# Altium PCB Smart_Clock_PCB.PcbDoc (part 1 of 2)
Units mil, origin at the board's own origin, x right, y up, seen from the top; angles counter-clockwise.
Board outline 3930 x 2549 mil, 2 copper layers (Top Layer, Bottom Layer); 123 components, 100 nets, 411 pads, 288 vias.
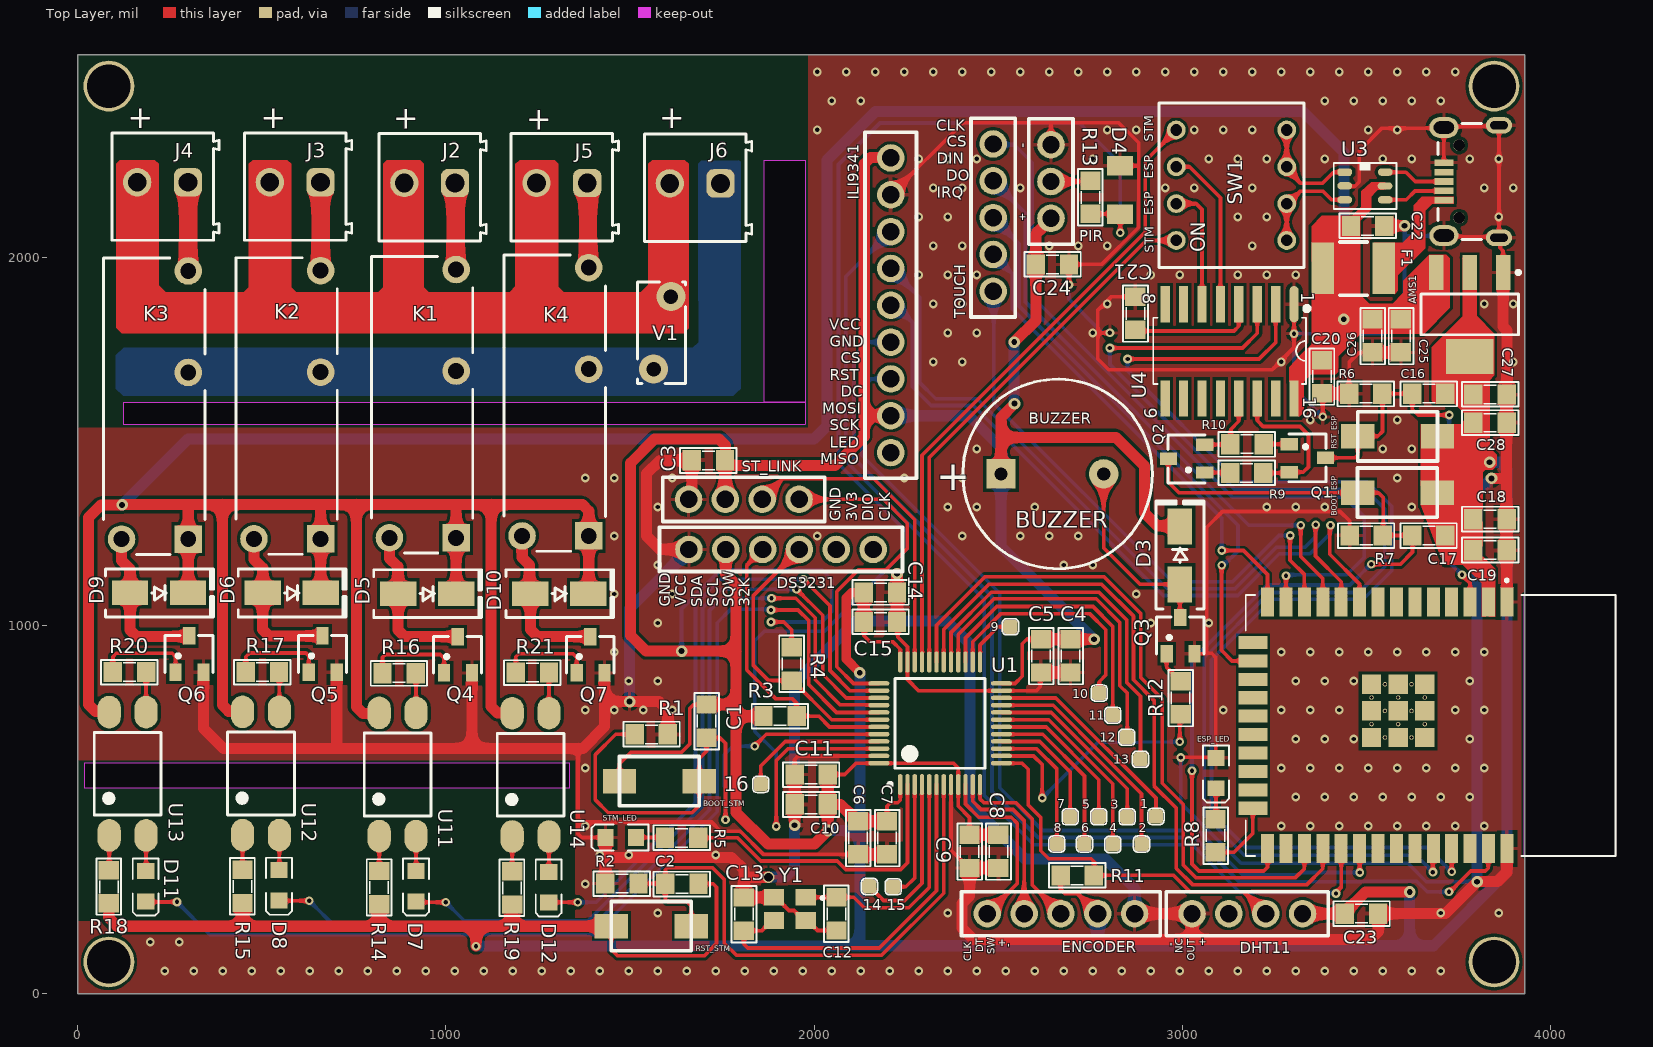
[diagram p0: Top Layer view]
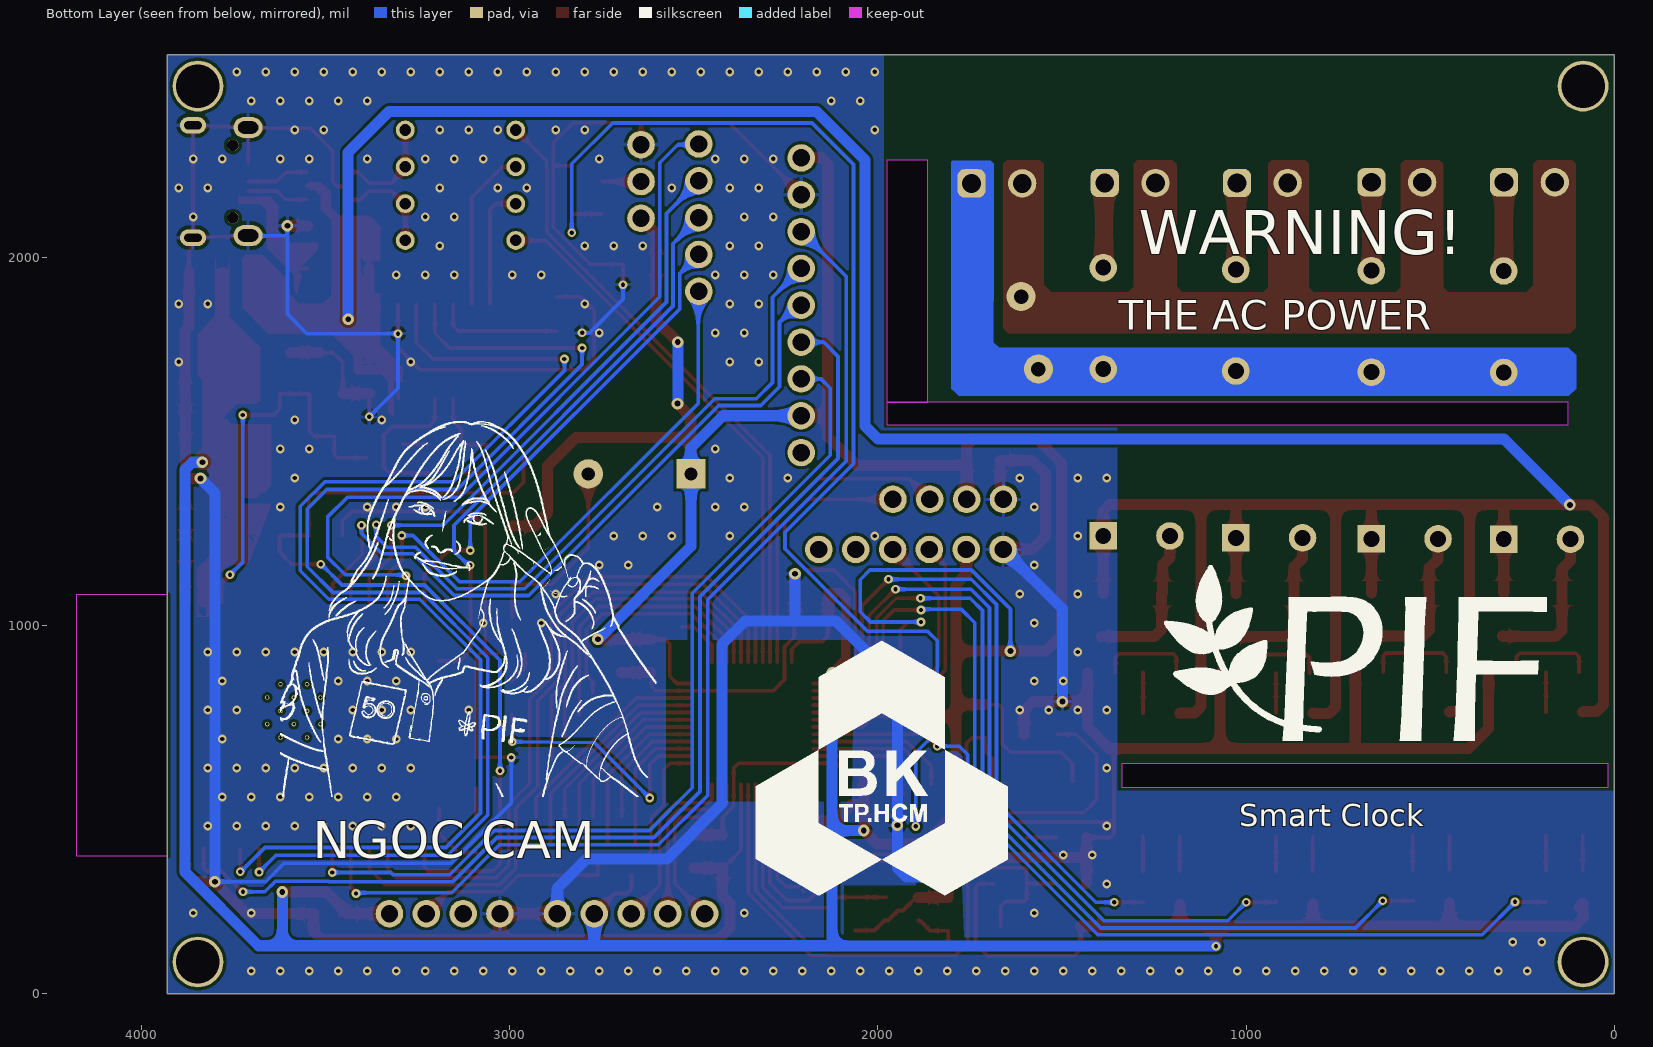
[diagram p1: Bottom Layer view, seen from below]
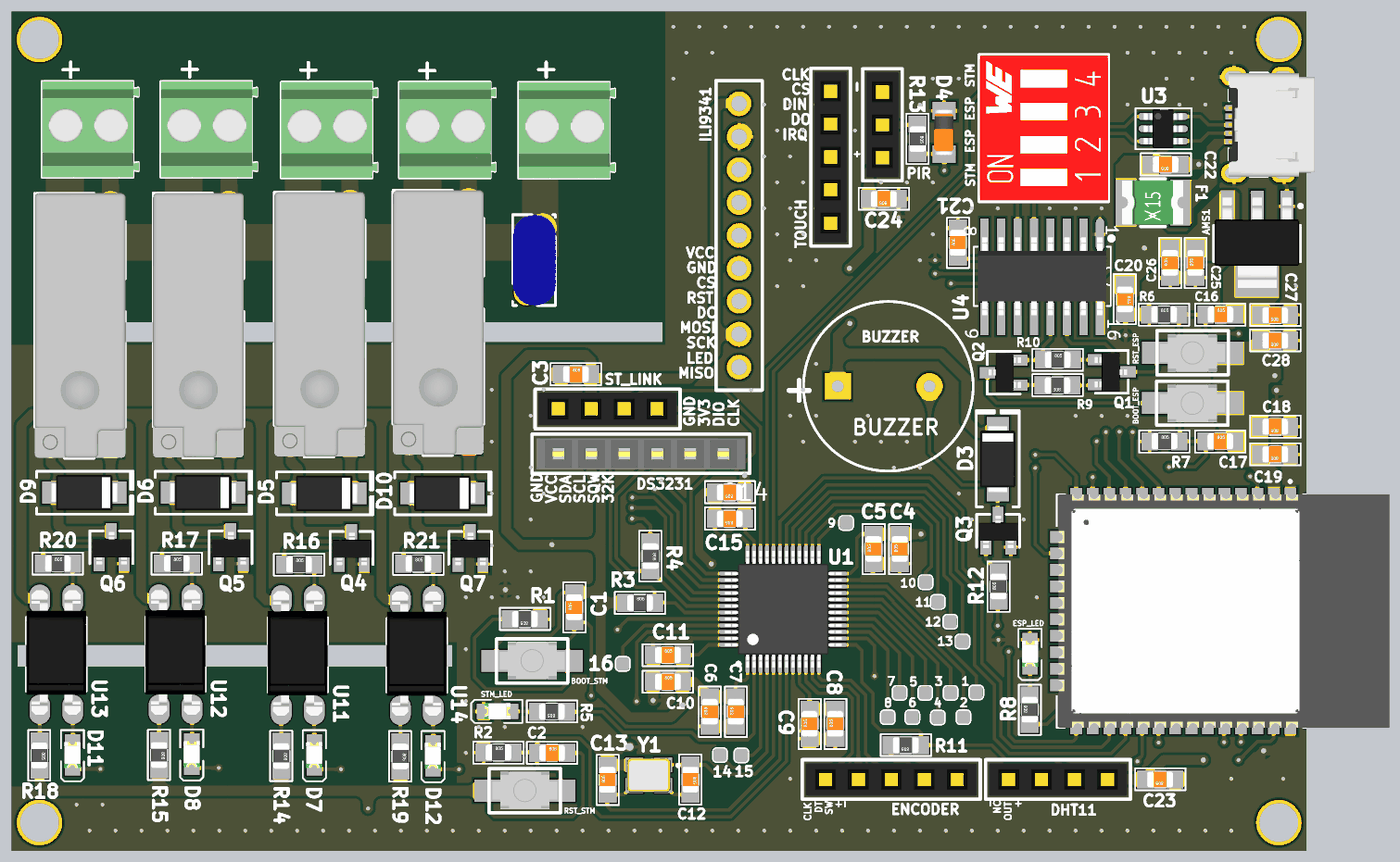
[diagram p3: 3D render of the assembled board from above, using the file's embedded part models]

## Layer stack, top to bottom
Top Solder: solder mask 0.4, Solder Resist, Dk 3.5
Top Layer: signal copper 1.4
Dielectric 1: dielectric 12.6, FR-4, Dk 4.8
Bottom Layer: signal copper 1.4
Bottom Solder: solder mask 0.4, Solder Resist, Dk 3.5

## Board outline
0,0 0,2549 3930,2549 3930,0
cut-out: 18,625 18,559 1337,559 1337,625
cut-out: 126,1545 126,1606 1976,1606 1976,1546 1975,1545
cut-out: 1864,2263 1976,2263 1976,1606 1864,1606

## Design rules (kind name [scope] priority, off if disabled: settings)
Clearance [All] p1: gap=8 ignorepadtopadclearanceinfootprint=FALSE except(0: Arc-Text Track-Text SMDPad-Text THPad-Text Via-Text Fill-Text Poly-Text Region-Text Text-Text)
PolygonConnect [All] p1: connectstyle=Relief reliefconductorwidth=10 reliefentries=4 polygonreliefangle="90 Angle" airgapwidth=10
RoutingVias [All] p1: holewidth=11.81 width=23.62 viastyle="Through Hole" minholewidth=11.81 minwidth=23.62 maxholewidth=11.81 maxwidth=23.62
SolderMaskExpansion [All] p1: expansion=4 istentingtop=FALSE
Width [All] p1: maxlimit=50 minlimit=10 preferedwidth=30
30 further rules are at their usual default settings.

## Classes and differential pairs
component class USB: C20 C21 C22 F1 Q1 Q2 R9 R10 SW1 U3 U4
component class RELAY: D5 D6 D7 D8 D9 D10 D11 D12 J2 J3 J4 J5 J6 K1 K2 K3 K4 Q4 Q5 Q6 Q7 R14 R15 R16 R17 R18 R19 R20 R21 U11 U12 U13 U14 V1
component class POWER_SUPPLY: AMS1 C25 C26 C27 C28
component class PERIPHERAL: C23 C24 D3 D4 DHT11 DS3231 ENCODER ILI9341 PIR Q3 R11 R12 R13 TOUCH
component class ESP32: BOOT_ESP C16 C17 C18 C19 ESP_LED R6 R7 R8 RST_ESP
component class STM32: 1 2 3 4 5 6 7 8 9 10 11 12 13 14 15 16 BOOT_STM C1 C2 C3 C4 C5 C6 C7 C8 C9 C10 C11 C12 C13 C14 C15 R1 R2 R3 R4 R5 RST_STM ST_LINK STM_LED U1 Y1

## Components (designator, comment, footprint, x,y, rotation, side; value= is the part's Value field where it differs from the comment)
1 "Test Point" TP 2928,481 r90 top
2 "Test Point" TP 2889,406 r90 top
3 "Test Point" TP 2850,480 r90 top
4 "Test Point" TP 2811,405 r90 top
5 "Test Point" TP 2773,480 r90 top
6 "Test Point" TP 2734,406 r90 top
7 "Test Point" TP 2695,480 r90 top
8 "Test Point" TP 2659,406 r90 top
9 "Test Point" TP 2533,996 r90 top
10 "Test Point" TP 2774,816 r90 top
11 "Test Point" TP 2811,756 r90 top
12 "Test Point" TP 2849,696 r90 top
13 "Test Point" TP 2886,636 r90 top
14 "Test Point" TP 2150,291 r90 top
15 "Test Point" TP 2215,290 r90 top
16 "Test Point" TP 1855,568 r90 top
*1 "ESP32 WROOM 32" ESP32-WROOM-32D 3673.91,728.35 r270 top
AMS1 "AMS1117-3.3V" SOT223 3780,1844 r180 top value="AMS1117-3.3V SOT223"
BOOT_ESP "Button SMD 2 Pin 3x4mm" "BUTTON SMD 2 PIN" 3475.46,1360 r0 top (schematic designator B4)
BOOT_STM "Button SMD 2 Pin 3x4mm" "BUTTON SMD 2 PIN" 1688,577 r180 top (schematic designator B1)
BUZZER "Buzzer" BUZZER 2586,1411 r0 top (schematic designator B*1)
C1 "Cap Non-Pol SMD" CAP-SM-0805 1708,695 r90 top value=1uF/25V
C2 "Cap Non-Pol SMD" CAP-SM-0805 1596,298 r0 top value=1uF/25V
C3 "Cap Non-Pol SMD" CAP-SM-0805 1668,1448 r0 top value=100nF/25V
C4 "Cap Non-Pol SMD" CAP-SM-0805 2696,872 r90 top value=1uF/25V
C5 "Cap Non-Pol SMD" CAP-SM-0805 2616,872 r90 top value=10nF/25V
C6 "Cap Non-Pol SMD" CAP-SM-0805 2119,378 r90 top value=1uF/25V
C7 "Cap Non-Pol SMD" CAP-SM-0805 2198,378 r90 top value=10nF/25V
C8 "Cap Non-Pol SMD" CAP-SM-0805 2500,341 r90 top value=1uF/25V
C9 "Cap Non-Pol SMD" CAP-SM-0805 2422,341 r90 top value=10nF/25V
C10 "Cap Non-Pol SMD" CAP-SM-0805 1947,514 r0 top value=1uF/25V
C11 "Cap Non-Pol SMD" CAP-SM-0805 1947,595 r0 top value=10nF/25V
C12 "Cap Non-Pol SMD" CAP-SM-0805 2060.5,261.5 r270 top value=10pF/25V
C13 "Cap Non-Pol SMD" CAP-SM-0805 1809,171 r90 top value=10pF/25V
C14 "Cap Non-Pol SMD" CAP-SM-0805 2225,1089 r180 top value=1uF/25V
C15 "Cap Non-Pol SMD" CAP-SM-0805 2225,1009 r180 top value=10nF/25V
C16 "Cap Non-Pol SMD" CAP-SM-0805 3624,1629 r0 top value=1uF/25V
C17 "Cap Non-Pol SMD" CAP-SM-0805 3623.78,1243.96 r0 top value=1uF/25V
C18 "Cap Non-Pol SMD" CAP-SM-0805 3880,1288 r180 top value=10uF/25V
C19 "Cap Non-Pol SMD" CAP-SM-0805 3880,1204 r180 top value=100nF/25V
C20 "Cap Non-Pol SMD" CAP-SM-0805 3379,1720 r270 top value=100nF/25V
C21 "Cap Non-Pol SMD" CAP-SM-0805 2872,1802 r90 top value=100nF/25V
C22 "Cap Non-Pol SMD" CAP-SM-0805 3547.5,2084.5 r180 top value=100nF/25V
C23 "Cap Non-Pol SMD" CAP-SM-0805 3531,217 r180 top value=100nF/25V
C24 "Cap Non-Pol SMD" CAP-SM-0805 2692,1980 r180 top value=10uF/25V
C25 "Cap Non-Pol SMD" CAP-SM-0805 3593,1741 r90 top value=1uF/25V
C26 "Cap Non-Pol SMD" CAP-SM-0805 3516,1741 r90 top value=100nF/25V
C27 "Cap Non-Pol SMD" CAP-SM-0805 3880,1550 r180 top value=100nF/25V
C28 "Cap Non-Pol SMD" CAP-SM-0805 3880,1627 r180 top value=1uF/25V
D3 "SS34" "DIODE SMA" 2993,1189.74 r90 top
D4 "3.3V" "DIODE ZENNER SMD SOD80" 2830,2181.94 r270 top
D5 "SS34" "DIODE SMA" 949.26,1086 r0 top
D6 "SS34" "DIODE SMA" 581.26,1088 r0 top
D7 "LED SMD" LED_0805_Blue 919,291.66 r270 top
D8 "LED SMD" LED_0805_Blue 547,294 r270 top
D9 "SS34" "DIODE SMA" 221.26,1088 r0 top
D10 "SS34" "DIODE SMA" 1308,1086 r0 top
D11 "LED SMD" LED_0805_Blue 185,291.66 r270 top
D12 "LED SMD" LED_0805_Blue 1279,289 r270 top
DHT11 "DHT11_4PIN" "Header 4 Pin" 3326,217 r180 top (schematic designator U8)
DS3231 "DS3231 RTC" "header 6 pin" 2060,1006 r180 top (schematic designator U7)
ENCODER "Rotary Encoder" "Header 5 Pin" 2470,217 r0 top (schematic designator U10)
ESP_LED "LED SMD" LED_0805_Blue 3091,599 r270 top (schematic designator D2)
F1 "6V, 1.5A" Fuse_SMD_1812 3463,1969 r180 top value="24V, 1.5A"
H1 "Hole" "LO KHOAN 3MM" 3846,86 r0 top
H2 "Hole" "LO KHOAN 3MM" 3846,2464 r0 top
H3 "Hole" "LO KHOAN 3MM" 85,86 r0 top
H4 "Hole" "LO KHOAN 3MM" 85,2464 r0 top
ILI9341 "ILI9341_DISPLAY" "HEADER 9 PIN" 2008,1569 r90 top (schematic designator U6)
J1 "Micro USB 2.0 Type B" 629105150521 3824,2205.03 r90 top
J2 "10A, 300V" 691214110002 956.1,2189.19 r180 top
J3 "10A, 300V" 691214110002 590.9,2191.19 r180 top
J4 "10A, 300V" 691214110002 230.9,2191.19 r180 top
J5 "10A, 300V" 691214110002 1315,2189.19 r180 top
J6 "10A, 300V" 691214110002 1676.9,2188.19 r180 top
K1 "277 VAC, 30 VDC" HF46F 937.45,1601.83 r270 top
K2 "277 VAC, 30 VDC" HF46F 569.45,1598.83 r270 top
K3 "277 VAC, 30 VDC" HF46F 210,1598 r270 top
K4 "277 VAC, 30 VDC" HF46F 1297.45,1606.83 r270 top
PIR "PIR" "Header 3 Pin" 2643,2105 r90 top (schematic designator U9)
Q1 "BC817" SOT-23 3339.21,1454.8 r270 top value=C9014
Q2 "BC817" SOT-23 3011.21,1451.8 r90 top value=C9014
Q3 "HF" SOT-23 2994,972 r0 top value=C9014
Q4 "HF" SOT-23 1032,920 r0 top value=C9014
Q5 "HF" SOT-23 665,922 r0 top value=C9014
Q6 "HF" SOT-23 303,922 r0 top value=C9014
Q7 "HF" SOT-23 1392,920 r0 top value=C9014
R1 "RESISTOR SMD" RES-SM-0805 1603,704 r180 top value=10K/1%
R2 "RESISTOR SMD" RES-SM-0805 1433,299 r0 top value=10K/1%
R3 "RESISTOR SMD" RES-SM-0805 1862.5,753.5 r0 top value=10K/1%
R4 "RESISTOR SMD" RES-SM-0805 1939,940 r270 top value=10K/1%
R5 "RESISTOR SMD" RES-SM-0805 1685,423 r180 top value=300/1%
R6 "RESISTOR SMD" RES-SM-0805 3453,1629 r0 top value=10K/1%
R7 "RESISTOR SMD" RES-SM-0805 3454,1244 r0 top value=10K/1%
R8 "RESISTOR SMD" RES-SM-0805 3090,384 r90 top value=300/1%
R9 "RESISTOR SMD" RES-SM-0805 3130.21,1491.8 r0 top value=10K/1%
R10 "RESISTOR SMD" RES-SM-0805 3219.21,1413.8 r180 top value=10K/1%
R11 "RESISTOR SMD" RES-SM-0805 2759,321 r180 top value=5.1K/1%
R12 "RESISTOR SMD" RES-SM-0805 2995,758 r90 top value=10K/1%
R13 "RESISTOR SMD" RES-SM-0805 2750,2207 r270 top value=1K/1%
R14 "RESISTOR SMD" RES-SM-0805 819,333 r270 top value=100/1%
R15 "RESISTOR SMD" RES-SM-0805 448,336 r270 top value=100/1%
R16 "RESISTOR SMD" RES-SM-0805 828,870 r0 top value=10K/1%
R17 "RESISTOR SMD" RES-SM-0805 457,873 r0 top value=10K/1%
R18 "RESISTOR SMD" RES-SM-0805 85,335 r270 top value=100/1%
R19 "RESISTOR SMD" RES-SM-0805 1180,332 r270 top value=100/1%
R20 "RESISTOR SMD" RES-SM-0805 96,873 r0 top value=10K/1%
R21 "RESISTOR SMD" RES-SM-0805 1190,872 r0 top value=10K/1%
RST_ESP "Button SMD 2 Pin 3x4mm" "BUTTON SMD 2 PIN" 3476,1513 r0 top (schematic designator B3)
RST_STM "Button SMD 2 Pin 3x4mm" "BUTTON SMD 2 PIN" 1666,183 r180 top (schematic designator B2)
ST_LINK "ST_Link" "Header 4 Pin" 1959,1342 r180 top (schematic designator U2)
STM_LED "LED SMD" LED_0805_Blue 1475,424 r180 top (schematic designator D1)
SW1 "418117270904" 418117270904 3133,2195 r90 top
TOUCH "ILI9341_TOUCH" "Header 5 Pin" 2486,1907 r90 top (schematic designator U5)
U1 "STM32F103xx_LQFP48" STM32_LQPF48 2342,734 r90 top
U3 "USBLC6-2SC6 TVS" SOT23-6 3500,2198 r0 top
U4 "CH340C" SOIC16_50_284_25X90_SMT 3129,1744 r270 top
U11 "OPTO PC817 SMD" SOP4 869,595 r90 top value=PC817
U12 "OPTO PC817 SMD" SOP4 498,597.68 r90 top value=PC817
U13 "OPTO PC817 SMD" SOP4 136,597 r90 top value=PC817
U14 "OPTO PC817 SMD" SOP4 1230,594 r90 top value=PC817
V1 "AC 300V" Varistor 1585,1792 r90 top
Y1 "16MHz" WE-XTAL_CFPX-180 1934,230 r180 top

## Footprints (in the part's own frame and the unit in brackets; to place one, negate y for a bottom-side part, rotate by r counter-clockwise, add the part's x,y. Pads: shape width x height; smd on the part's side, far side on the other; paste and mask are expansions set on the pad)
418117270904 [mm] "2.54 mm compact THT with raised actuator, 4p"
  round 1.3 hole 0.8: 1(-3.81,-3.81) 2(-1.27,-3.81) 3(1.27,-3.81) 4(3.81,-3.81) 5(3.81,3.81) 6(1.27,3.81) 7(-1.27,3.81) 8(-3.81,3.81)
  silkscreen extent -5.68,-5 5.68,5, body extent -5.58,-4.95 5.58,4.95, height 6.9
629105150521 [mm] "Micro USB 2.0 SMT Type B Horizontal 5 Contacts High Current"
  rect 0.45x1.3 smd: 1(-1.3,2.9) 2(-0.65,2.9) 3(0,2.9) 4(0.65,2.9) 5(1.3,2.9)
  round 0.8 hole 0.8 unplated: MH1(-2.5,1.85) MH2(2.5,1.85)
  oval 1.15x1.8 hole 0.55 slot 1.2 at 90 deg: Shell(-3.875,-0.9) Shell(3.875,-0.9)
  oval 1.45x2 hole 0.85 slot 1.4 at 90 deg: Shell(-3.725,2.9) Shell(3.725,2.9)
  silkscreen extent -4,0.3 4,3.3, body extent -4,-3.3 4,3.3, height 2.75
691214110002 [mm] "3.50 mm Horizontal Entry Modular, 2p"
  rrect50% 1.95x1.95 hole 1.3: 1(-1.75,-0.3)
  round 1.95 hole 1.3: 2(1.75,-0.3)
  silkscreen extent -3.9,-3.7 3.5,3.7, body extent -3.95,-3.7 3.5,3.7, height 8.55
"BUTTON SMD 2 PIN" [mm] "Button SMD 2 Pin 3x4mm"
  rect 2.3x1.7 smd: 1(0,0) 2(5.5,0)
  silkscreen extent 0,-1.7 5.5,1.7, body extent 0.24,-1.48 5.24,1.42, height 2
BUZZER [mil]
  rect 80x80 hole 36: 1(-78.73,0)
  round 80 hole 36: 2(200,0)
  silkscreen extent -182,-257 332,257
CAP-SM-0805 [mil]
  rect 50x55 smd: 1(0,0) 2(90,0)
  silkscreen extent -32,-34 121,33, body extent 6,-25 84,25, height 31
"DIODE SMA" [mm] "SMA"
  rect 2.5x1.7 smd: 1(-2,0) 2(2,0)
  silkscreen extent -3.68,-1.65 3.75,1.65, body extent -2.6,-1.37 2.6,1.37, height 2.4
"DIODE ZENNER SMD SOD80" [mm] "SOD80"
  rect 1.35x1.8 smd: 1(1.675,0) 2(-1.675,0)
  body extent -1.75,-0.76 1.75,0.74, height 1.45
ESP32-WROOM-32D [mm]
  rect 2x0.9 smd: 1(-8.5,5.26) 2(-8.5,3.99) 3(-8.5,2.72) 4(-8.5,1.45) 5(-8.5,0.18) 6(-8.5,-1.09) 7(-8.5,-2.36) 8(-8.5,-3.63) 9(-8.5,-4.9) 10(-8.5,-6.17) 11(-8.5,-7.44) 12(-8.5,-8.71) 13(-8.5,-9.98) 14(-8.5,-11.25) 25(8.5,-11.25) 26(8.5,-9.98) 27(8.5,-8.71) 28(8.5,-7.44) 29(8.5,-6.17) 30(8.5,-4.9) 31(8.5,-3.63) 32(8.5,-2.36) 33(8.5,-1.09) 34(8.5,0.18) 35(8.5,1.45) 36(8.5,2.72) 37(8.5,3.99) 38(8.5,5.26)
  rect 0.9x2 smd: 15(-5.715,-12.25) 16(-4.445,-12.25) 17(-3.175,-12.25) 18(-1.905,-12.25) 19(-0.635,-12.25) 20(0.635,-12.25) 21(1.905,-12.25) 22(3.175,-12.25) 23(4.445,-12.25) 24(5.715,-12.25)
  rect 1.33x1.33 smd: 39(-2.835,-0.405) 39(-2.835,-2.24) 39(-2.835,-4.075) 39(-1,-0.405) 39(-1,-2.24) 39(-1,-4.075) 39(0.835,-0.405) 39(0.835,-2.24) 39(0.835,-4.075)
  round 0.3 hole 0.2: 39(-2.835,-1.322) 39(-2.835,-3.157) 39(-1.917,-0.405) 39(-1.917,-2.24) 39(-1.917,-4.075) 39(-1,-1.322) 39(-1,-3.157) 39(-0.082,-0.405) 39(-0.082,-2.24) 39(-0.082,-4.075) 39(0.835,-1.322) 39(0.835,-3.157)
  Keep-Out Layer region: 9,6.45 -9,6.45 -9,12.75 9,12.75
  Keep-Out Layer region: 9,6.45 -9,6.45 -9,12.75 9,12.75
  silkscreen extent -10.1,-12.75 9,12.75, body extent -9,-12.62 9,12.88, height 3.2
Fuse_SMD_1812 [mil] "Fuse SMD, size 1812"
  rect 60x140 smd: 0(-83.41,0) 1(82,0)
  silkscreen extent -38,-72 36,73, body extent -93,-67 93,67, height 18
"Header 3 Pin" [mm] "2.54mm"
  round 1.9 hole 1.2: 1(0,0) 2(2.54,0) 3(5.08,0)
  silkscreen extent -1.78,-1.52 6.86,1.52, body extent -1.52,-1.25 6.6,1.25, height 4.75
"Header 4 Pin" [mm] "2.54mm"
  round 1.9 hole 1.2: 1(0,0) 2(2.54,0) 3(5.08,0) 4(7.62,0)
  silkscreen extent -1.78,-1.52 9.4,1.52, body extent -1.52,-1.25 9.14,1.25, height 5
"Header 5 Pin" [mm] "2.54mm"
  round 1.9 hole 1.2: 1(0,0) 2(2.54,0) 3(5.08,0) 4(7.62,0) 5(10.16,0)
  silkscreen extent -1.78,-1.52 11.94,1.52, body extent -1.52,-1.25 11.68,1.25, height 4.75
"header 6 pin" [mm] "2.54mm"
  round 1.9 hole 1.2: 1(-2.54,-5.08) 2(0,-5.08) 3(2.54,-5.08) 4(5.08,-5.08) 5(7.62,-5.08) 6(10.16,-5.08)
  silkscreen extent -4.57,-6.6 12.19,-3.56, body extent -4.24,-6.28 11.86,-3.88, height 8.3
"HEADER 9 PIN" [mm] "2.54mm"
  round 1.9 hole 1.2: 6(-2.54,-5.08) 7(0,-5.08) 8(2.54,-5.08) 9(5.08,-5.08) 10(7.62,-5.08) 11(10.16,-5.08) 12(12.7,-5.08) 13(15.24,-5.08) 14(17.78,-5.08)
  silkscreen extent -4.32,-6.86 19.56,-3.3
HF46F [mm]
  rect 1.9x1.9 hole 1.1: 1(9.25,2.3)
  round 1.9 hole 1.1: 2(9.25,-2.3) 3(-2.25,2.3) 4(-9.25,2.3)
  silkscreen extent -10.14,-3.55 10.31,3.44, body extent -10.14,-3.55 10.26,3.45, height 15.76
LED_0805_Blue [mm] "Chip LED, 2-Leads, Body 2.0x1.3mm, IPC Medium Density"
  rect 1.1x1.2 smd: 1(-1.05,0) 2(1.05,0)
  silkscreen extent -1.91,-0.89 2.03,0.89, body extent -1,-0.63 1,0.62, height 0.68
"LO KHOAN 3MM" [mil]
  round 138 hole 118.1: 1(0,0)
RES-SM-0805 [mil]
  rect 50x55 smd: 1(0,0) 2(90,0)
  silkscreen extent -32,-34 121,33, body extent 6,-25 84,25, height 31
SOIC16_50_284_25X90_SMT [mm]
  oval 2.5x0.635 smd mask+0.076: 1(-3.25,4.42)
  rect 2.5x0.635 smd mask+0.076: 2(-3.25,3.15) 3(-3.25,1.88) 4(-3.25,0.61) 5(-3.25,-0.66) 6(-3.25,-1.93) 7(-3.25,-3.2) 8(-3.25,-4.47) 9(3.25,-4.47) 10(3.25,-3.2) 11(3.25,-1.93) 12(3.25,-0.66) 13(3.25,0.61) 14(3.25,1.88) 15(3.25,3.15) 16(3.25,4.42)
  silkscreen extent -3.07,-5.3 2.26,5.44, body extent -3.02,-4.97 2.98,4.93, height 1.4
SOP4 [mm]
  oval 2.25x1.6 smd: 1(-4.25,1.27) 2(-4.25,-1.27) 3(4.25,-1.27) 4(4.25,1.27)
  silkscreen extent -2.85,-2.3 2.85,2.3, body extent -4.67,-2.29 4.93,2.31, height 3.6
SOT23-6 [mil]
  oct 40x20 smd: 1(-59.41,32.4)
  oval 40x20 smd: 2(-59.41,-4.6) 3(-59.41,-42.6) 4(50.59,-42.6) 5(50,-5) 6(50.59,32.4)
  silkscreen extent -89,-68 81,57, body extent -64,-64 54,54, height 51
SOT223 [mm]
  rect 1x2.4 smd: 1(-2.3,-2.9) 2(0,-2.9) 3(2.3,-2.9)
  rect 3.3x2.4 smd: 4(0,2.9)
  silkscreen extent -3.48,-3.02 3.35,1.4, body extent -3.25,-3.56 3.25,3.4, height 1.68
SOT-23 [mm] "SOT 23 _ 1-3-2"
  rect 0.85x1.2 smd: 1(-0.94,-1.245) 2(0.985,-1.25) 3(0.005,1.25)
  silkscreen extent -1.65,-1.27 1.65,1.27, body extent -1.47,-1.33 1.53,1.17, height 1.06
STM32_LQPF48 [mm]
  oval 1.45x0.3 smd: 1(-4.225,2.75) 2(-4.225,2.25) 3(-4.225,1.75) 4(-4.225,1.25) 5(-4.225,0.75) 6(-4.225,0.25) 7(-4.225,-0.25) 8(-4.225,-0.75) 9(-4.225,-1.25) 10(-4.225,-1.75) 11(-4.225,-2.25) 12(-4.225,-2.75) 25(4.225,-2.75) 26(4.225,-2.25) 27(4.225,-1.75) 28(4.225,-1.25) 29(4.225,-0.75) 30(4.225,-0.25) 31(4.225,0.25) 32(4.225,0.75) 33(4.225,1.25) 34(4.225,1.75) 35(4.225,2.25) 36(4.225,2.75)
  oval 0.3x1.45 smd: 13(-2.75,-4.225) 14(-2.25,-4.225) 15(-1.75,-4.225) 16(-1.25,-4.225) 17(-0.75,-4.225) 18(-0.25,-4.225) 19(0.25,-4.225) 20(0.75,-4.225) 21(1.25,-4.225) 22(1.75,-4.225) 23(2.25,-4.225) 24(2.75,-4.225) 37(2.75,4.225) 38(2.25,4.225) 39(1.75,4.225) 40(1.25,4.225) 41(0.75,4.225) 42(0.25,4.225) 43(-0.25,4.225) 44(-0.75,4.225) 45(-1.25,4.225) 46(-1.75,4.225) 47(-2.25,4.225) 48(-2.75,4.225)
  silkscreen extent -4.35,-3.1 3.1,3.57, body extent -4.5,-4.5 4.5,4.5, height 1.6
TP [mm]
  rrect50% 1x1 smd: 1(0,0)
  silkscreen extent -0.56,-0.56 0.56,0.56
Varistor [mm]
  round 2 hole 1: 1(-2.442,0.535) 2(2.558,-0.665)
  silkscreen extent -3.44,-1.67 3.56,1.63, body extent -3.44,-1.71 3.55,1.59, height 8.5
WE-XTAL_CFPX-180 [mm] "Quartz Crystal, size CFPX-180, body 3.4x2.7mm"
  rect 1.4x1.15 smd: 1(-1.1,-0.8) 2(1.1,-0.8) 3(1.1,0.8) 4(-1.1,0.8)
  silkscreen extent -2.35,-0.85 -2.15,-0.65, body extent -1.7,-1.35 1.7,1.35, height 0.65

## Part data
AMS1: library part "AMS1117 SMD", "Dán", Chung_Loai=Dán, Don_Vi=Con, Ma_Hang=MH000596
BOOT_ESP BOOT_STM RST_ESP RST_STM: library part BUTTON
C1 C2 C3 C4 C5 C6 C7 C8 C9 C10 C11 C12 C13 C14 C15 C16 C17 C18 C19 C20 C21 C22 C23 C24 C25 C26 C27 C28: "Capacitor"
D3 D5 D6 D9 D10: library part "Diode SS34 ( 1N5822 )", "Dán", Chung_Loai=Dán, Don_Vi=Con, Ma_Hang=MH002104, Ten_Linh_Kien="Diode SS34 3A 40V SMA ( 1N5822 SS34A)"
D4: library part "Diode Zener 3.3V", "Dán", Chung_Loai=Dán, Don_Vi=Con, Ma_Hang=MH002880, Ten_Linh_Kien="Diode Zener 1/2W 3.3V SMD1206 ZMM3.3"
D7 D8 D11 D12 ESP_LED STM_LED: "LED"
DS3231: library part DS3231, "DS3231 RTC Module"
F1: library part 061812150024, "Resettable Fuse, Size 1812, 24V, 1.5A", Hold Current=1.5A, Manufacturer=Littelfuse, Threshold Current=20A, Threshold Voltage=24V, Trip Current=3A, ComponentLink1Description="Datasheet link", ComponentLink1URL=https://www.littelfuse.com/~/media/electronics/product_specifications/resettable_ptcs/littelfuse_ptc_minismdc300f_2_product_specification.pdf.pdf, ComponentLink2Description="Supplier 1 URL", ComponentLink2URL=https://www.mouser.vn/ProductDetail/Littelfuse/MINISMDC150F-24-2?qs=F6FIpiMdEVZ%2Fp37J%2FDHAxA%3D%3D, ComponentLink3Description="Supplier 2 URL", ComponentLink3URL=https://www.digikey.com/en/products/detail/littelfuse-inc/MINISMDC150F-24-2/1113513?s=N4IgTCBcDaILIEkByCDKcAiBhAjAVgAYAxAejABYBaCAXQF8g, ComponentLink4Description="Supplier 3 URL", ComponentLink4URL=https://www.thegioiic.com/cau-chi-tu-phuc-hoi-1812-24v-1-5a, Mounting Technology=SMT/SMD, Size=1812, Supplier 1 Name=Mouser, Supplier 1 SN=650-MINISMDC150F/24, Supplier 1 URL=https://www.mouser.vn/ProductDetail/Littelfuse/MINISMDC150F-24-2?qs=F6FIpiMdEVZ%2Fp37J%2FDHAxA%3D%3D, Supplier 2 Name=Digi-Key, Supplier 2 SN=MINISMDC150F24-2TR-ND, Supplier 2 URL=https://www.mouser.vn/ProductDetail/Littelfuse/MINISMDC150F-24-2?qs=F6FIpiMdEVZ%2Fp37J%2FDHAxA%3D%3D, Supplier 3 Name=thegioiic, Supplier 3 SN=N/A, Supplier 3 URL=https://www.thegioiic.com/cau-chi-tu-phuc-hoi-1812-24v-1-5a
H1 H2 H3 H4: "Hole 3mm"
J1: library part 629105150521, "Micro USB 2.0 Type B Receptacle WR-COM, Horizontal, SMT, with Pegs, High Current at Pin 1 & Pin 5", Contact Resistance="30 mOhm", Operating Temperature="-40 to 85 degC", Rated Current="3 A", Working Voltage="30 VAC", ComponentLink1Description=Datasheet, ComponentLink1URL=https://katalog.we-online.de/em/datasheet/629105150521.pdf, ComponentLink2Description="Supplier 1 URL", ComponentLink2URL=N/A, ComponentLink3Description="Supplier 2 URL", ComponentLink3URL=N/A, ComponentLink4Description="Supplier 3 URL", ComponentLink4URL=N/A, Connector Type="Micro USB 2.0 Type B", Gender=Receptacle, Mounting Technology=SMT, Orientation=Horizontal, Packaging="Tape and Reel", Part Number=629105150521, Published Date="September 2018", Publisher="Wurth Elektronik", Supplier 1 Name=Mouser, Supplier 1 SN=710-629105150521, Supplier 1 URL=https://www.mouser.vn/ProductDetail/Wurth-Elektronik/629105150521?qs=a9WhcLg8qCzXiH7kZP8GRQ%3D%3D, Supplier 2 Name=Digi-Key, Supplier 2 SN=N/A, Supplier 2 URL=N/A, Supplier 3 Name=thegioiic, Supplier 3 SN=N/A, Supplier 3 URL=N/A
J2 J3 J4 J5 J6: library part 691214110002, "WR-TBL Series 2141 Horizontal Entry Modular, THT, pitch 3.5mm, 2p", Manufacturer="Wurth Elektronik", Operating Temperature Max=105°C, Operating Temperature Min=-40°C, Rated Current=10A, Working Voltage=300V, Application="Rising Cage Clamp", Category="Terminal Blocks", ComponentLink1Description="Website Link", ComponentLink1URL=https://www.we-online.com/redexpert/article/691214110002?ad, ComponentLink2Description="Supplier 1 URL", ComponentLink2URL=N/A, ComponentLink3Description="Supplier 2 URL", ComponentLink3URL=N/A, ComponentLink4Description="Supplier 3 URL", ComponentLink4URL=https://www.thegioiic.com/kf350-2-v-domino-2-chan-thang-3-5mm-300v-10a-han-pcb, Manufacturer Part Number=691214110002, Match Code=WR-TBL, Modularity=Yes, Mount="Through Hole", Number of Pins=2, Number of Rows=1, Orientation=Horizontal, Packaging=Box, Pitch=3.5mm, Supplier 1 Name=Mouser, Supplier 1 SN=N/A, Supplier 1 URL=N/A, Supplier 2 Name=Digi-Key, Supplier 2 SN=N/A, Supplier 2 URL=N/A, Supplier 3 Name=thegioiic, Supplier 3 SN=N/A, Supplier 3 URL=https://www.thegioiic.com/kf350-2-v-domino-2-chan-thang-3-5mm-300v-10a-han-pcb
K1 K2 K3 K4: library part "HF46F-G 12-HS1", "Coil Voltage: 12 VDC; Contact Current Rating: 7A; Switching Voltage Max: 277 VAC, 30 VDC", Coil Current=N/A, Coil Voltage="12 VDC", Contact Current Rating=7A, Associated Relay Series=N/A, Coil Resistance=N/A, ComponentLink1Description="Datasheet link", ComponentLink1URL=https://source.hongfa.com//pdf/web/viewer.html?file=/Uploads/Product/PDF/HF46F-G_en.pdf?timestamp=1691116874, ComponentLink2Description="Supplier 1 URL", ComponentLink2URL=N/A, ComponentLink3Description="Supplier 2 URL", ComponentLink3URL=N/A, ComponentLink4Description="Supplier 3 URL", ComponentLink4URL=https://www.thegioiic.com/hf46f-g-12-hs1-ro-le-12vdc-7a-spst-no-4-chan, Power Consumption=N/A, Supplier 1 Name=Mouser, Supplier 1 SN=N/A, Supplier 1 URL=N/A, Supplier 2 Name=Digi-Key, Supplier 2 SN=N/A, Supplier 2 URL=N/A, Supplier 3 Name=thegioiic, Supplier 3 SN=N/A, Supplier 3 URL=https://www.thegioiic.com/hf46f-g-12-hs1-ro-le-12vdc-7a-spst-no-4-chan, Switching Voltage Max="277 VAC, 30 VDC"
Q1 Q2: library part "Trans BC817", "SOT-23 - C8658"
Q3 Q4 Q5 Q6 Q7: library part "Trans C1815 HF SMD", "SOT-23"
R1 R2 R3 R4 R5 R6 R7 R8 R9 R10 R11 R12 R13 R14 R15 R16 R17 R18 R19 R20 R21: "Resistor"
SW1: "WS-DITV Compact THT Dip Switch, Raised Actuator, pitch 2.54mm, 4p", Manufacturer="Wurth Elektronik", Operating Temperature Max=85°C, Operating Temperature Min=-40°C, Rated Current Non-Switching=100mA, Rated Current Switching=25mA, Rated Voltage Non-Switching=50VDC, Rated Voltage Switching=24VDC, Actuator Type="Raise Type", Category="Dip Switches", ComponentLink2Description="Datasheet Link", ComponentLink2URL=https://www.we-online.com/redexpert/spec/418117270904?ad, Contact Material="Copper Alloy", Contact Plating=Gold, Manufacturer Part Number=418117270904, Match Code=WS-DITV, Mount="Through Hole", Number of Poles=4, Operation Force=800g, Packaging=Tube, Pitch=2.54mm, Supplier 1 Name=Mouser, Supplier 1 SN=710-418117270904, Supplier 1 URL=https://www.mouser.com/ProductDetail/Wurth-Elektronik/418117270904?qs=wr8lucFkNMUW2I6n2hVTKw%3D%3D, Supplier 2 Name=Digi-Key, Supplier 2 SN=732-3834-5-ND, Supplier 2 URL=https://www.digikey.com/en/products/detail/w%C3%BCrth-elektronik/418117270904/3174489, Supplier 3 Name=Thegioiic, Supplier 3 SN=N/A, Supplier 3 URL=https://www.thegioiic.com/cong-tac-4-bit-dip-switch-xuyen-lo-2-54mm-mau-do
U3: library part IC_LTC6992IS6-1, "Oscillator, Silicon IC 3.81Hz ~ 1MHz TSOT-23-6", Alternate Part Number-1=NA, Case/Package=SOT-23-6, Manufacturer="Linear Technology/Analog Devices", Manufacturer Part Number=LTC6992IS6-1, Supplier Part Number-1=LTC6992IS6-1#TRMPBF, Supplier-1=Arrow
U4: "USB Bridge, USB to UART USB 2.0 UART Interface", Alternate Part Number-1=NA, Case/Package=SOIC16, Manufacturer=Olimex, Supplier Part Number-1=C84681, Manufacturer Part Number=CH340C, Supplier-1=LCSC
U11 U12 U13 U14: "Single Opto"
V1: library part 05000730110, "Varistors 7D471K AC 300V", Capacitance=N/A, Manufacture  Name=Bourns, Manufacture  SN=7D471K, Tolerance="+/- 10%", Voltage=300V, ComponentLink1Description="Datasheet link", ComponentLink1URL=N/A, ComponentLink2Description="Supplier 1 URL", ComponentLink2URL=N/A, ComponentLink3Description="Supplier 2 URL", ComponentLink3URL=N/A, ComponentLink4Description="Supplier 3 URL", ComponentLink4URL=N/A, Diameter=7mm, Supplier 1 Name=Mouser, Supplier 1 SN=N/A, Supplier 1 URL=N/A, Supplier 2 Name=Digi-Key, Supplier 2 SN=N/A, Supplier 2 URL=N/A, Supplier 3 Name=thegioiic, Supplier 3 SN=N/A, Supplier 3 URL=https://www.thegioiic.com/tu-chong-set-varistor-7d471k-300v
Y1: library part 073525166008, "WE-XTAL Quartz Crystal, SMT, CFPX-180, 16MHz, +/-20ppm", Frequency Stability=+/-50ppm, Frequency Tolerance=+/-15ppm, Load Capacitance=8pF, Manufacturer=NDK, Manufacturer Part Number=NX3225SA-16.000M-STD-CRS-2, Operating Temperature="-10 to +60degC", ComponentLink1Description="Datasheet link", ComponentLink1URL=https://www.mouser.com/datasheet/2/905/c_NX3225SA_e-1317523.pdf, ComponentLink2Description="Supplier 1 URL", ComponentLink2URL=https://www.mouser.com/ProductDetail/NDK/NX3225SA-16.000M-STD-CRS-2?qs=55YtniHzbhB2yRxaVPeqhg%3D%3D, ComponentLink3Description="Supplier 2 URL", ComponentLink3URL=https://www.digikey.com/en/products/detail/ndk-america-inc/NX3225SA-16-000M-STD-CRS-2/1788469, ComponentLink4Description="Supplier 3 URL", ComponentLink4URL=https://www.thegioiic.com/thach-anh-16mhz-5032-4-chan-smd, Frequency=16MHz, Mounting Technology=SMT, Size=CFPX-104/5032, Supplier 1 Name=Mouser, Supplier 1 SN=344-NX3225SA16MCRS2, Supplier 1 URL=https://www.mouser.com/ProductDetail/NDK/NX3225SA-16.000M-STD-CRS-2?qs=55YtniHzbhB2yRxaVPeqhg%3D%3D, Supplier 2 Name=Digi-Key, Supplier 2 SN=644-1129-2-ND, Supplier 2 URL=https://www.digikey.com/en/products/detail/ndk-america-inc/NX3225SA-16-000M-STD-CRS-2/1788469, Supplier 3 Name=thegioiic, Supplier 3 SN=N/A, Supplier 3 URL=https://www.thegioiic.com/thach-anh-16mhz-5032-4-chan-smd
U1: ComponentLink1Description="Manufacturer Link", ComponentLink1URL=www.st.com/stm32, ComponentLink2Description=Datasheet, ComponentLink2URL=http://www.st.com/stonline/products/literature/ds/13587.pdf, DatasheetVersion="rev6, Mar-2008", PackageDescription="48-Pin Low-Profile Quad Flat Pack, 7 x 7 mm Body, 0.5 mm Pitch (LQFP48)", PackageReference=LQFP48, PackageVersion=Mar-2008, Published=30-May-2008, Publisher="Altium Limited"

## Via types
v1: diameter 23.62, hole 11.81, Top Layer to Bottom Layer, tented both sides, 271 vias
v2: diameter 31.5, hole 15.75, Top Layer to Bottom Layer, tented both sides, 16 vias
v3: diameter 31.5, hole 23.62, Top Layer to Bottom Layer, tented both sides, 1 vias

## Nets (pads, with @x,y where several pads share a name; then routed paths per layer and width w, separated by ;. In a path a pad name is that pad's centre, name@x,y a point inside that pad or via, vN(x,y) a via of type N, cw(c..) or ccw(c..) an arc to the next point about the centre after c; other vN are vias at no path point)
+3.3V: *1.2 AMS1.2 AMS1.4 BOOT_ESP.2 BOOT_STM.2 BUZZER.1 C1.2 C2.2 C3.2 C4.2 C5.2 C6.2 C7.2 C8.2 C9.2 C10.2 C11.2 C14.2 C15.2 C16.2 C17.2 C18.2 C19.2 C23.2 C24.2 C27.2 C28.2 D3.2 DHT11.1 DS3231.5 ENCODER.4 ILI9341.7 ILI9341.14 PIR.1 R3.1 R4.1 R11.2 R14.2 R15.2 R18.2 R19.2 RST_ESP.2 RST_STM.2 ST_LINK.3 U1.1 U1.9 U1.24 U1.36 U1.48 | length 18621.4
  Top Layer w10: RST_STM.2@1449.46,183 1449.46,119.54 1466,103 1702,103 1735,136 1735,289 1726,298 C2.2@1686,298 ; BOOT_STM.2@1471.46,577 1471.46,624.46 1502,655 1639,655 1662,678 1662,774 1672.5,784.5 1707.5,784.5 C1.2@1708,785 ; v1(1883,1009) 1917.37,1009 1939,987.37 R4.1@1939,940 ; C11.2@2037,595 2083,595 2113.73,625.73 U1.48@2175.66,625.73 2378.27,625.73 2391.21,612.79 U1.9@2391.21,567.66 2391.21,509.33 2422,478.54 C9.2@2422,431 ; C15.2@2135,1009 2135.5,1008.5 2135.5,971.5 2152,955 2214,955 2233.73,935.27 U1.36@2233.73,900.34 ; C7.2@2198,468 2198,509 2207,518 2227,518 2233.73,524.73 U1.1@2233.73,567.66 ; U1.24@2508.34,842.27 2545.27,842.27 2565,862 2565,950 2577,962 C5.2@2616,962 ; R11.2@2669,321 2669,284 2681,272 2715,272 ENCODER.4@2770,217 ; C17.2@3714,1244 3714,1241.5 3751.5,1204 C19.2@3790,1204
  Top Layer w25: C14.2@2122.5,1074 2135,1086.5 C14.2@2135,1089 2101.64,1089 2087,1074.36 2087,908.42 v2(2124,871.42)
  Top Layer w30: R18.2@96.71,235 86.71,245 R18.2@85,245 85,205 107,183 448,183 ; R15.2@448,246 448,183 ; R14.2@819,243 819,183 ; v1(1082,129) 1082.17,129.17 1082.17,183 ; R19.2@1180,242 1180,183 ; RST_STM.2@1449.46,183 1180,183 ; C1.2@1708,785 1788,785 ; C3.2@1758.5,1434 1758.5,1342.5 ST_LINK.3@1759,1342 ; DS3231.5@1760,1206 1760,1139 1788,1111 1788,930 ; R3.1@1862.5,753.5 1788,753.5 ; C11.2@2037,595 C10.2@2037,514 ; C15.2@2135,1009 C14.2@2135,1074 ; C7.2@2198,468 C6.2@2119,468 2116.5,468 2071.5,513 2038,513 C10.2@2037,514 ; ILI9341.7@2208,1569 2136,1569 ; ILI9341.14@2208,2269 2207,2270 2153.57,2270 2136,2252.43 2136,1569 ; C9.2@2422,431 C8.2@2500,431 ; BUZZER.1@2507.27,1411 2507.27,1510 ; v2(2543,1769) 2602,1828 C24.2@2602,1980 2602,2063 2643,2104 PIR.1@2643,2105 ; v2(2544,1602) 2544,1601.6 2507.27,1564.86 2507.27,1510 ; C5.2@2616,962 C4.2@2696,962 v2(2760,962) ; D3.2@2993,1268.48 2991.59,1269.89 2932.11,1269.89 2897,1305 2897,1433 2820,1510 2507.27,1510 ; DHT11.1@3326,217 C23.2@3441,217 3441,219.5 3497.5,276 v2(3617,276) ; BOOT_ESP.2@3692,1360 BOOT_ESP.2@3692.23,1360.23 ; RST_ESP.2@3692.54,1513 3692.54,1360.54 BOOT_ESP.2@3692.23,1360.23 ; C16.2@3714,1629 3715,1628 3789,1628 C28.2@3790,1627 ; AMS1.2@3780,1958.17 AMS1.4@3780,1729.83 3780,1674 3791,1663 3791,1628 C28.2@3790,1627 ; *1.2@3831,1063 3831,1116 3790,1157 C19.2@3790,1204 C18.2@3790,1288 3790,1357 ; v2(3834,1443) 3833.71,1443.29 3796.71,1443.29 3790,1450 ; 448,183 819,183 ; 819,183 1082.17,183 ; 1082.17,183 1180,183 ; 1788,753.5 1788,492.05 1874.05,406 2000.6,406 2037.6,443 v2(2038,443) 2038,443.4 2037,444.4 C10.2@2037,514 ; 1788,753.5 1788,785 ; 1788,785 1788,930 ; 1788,930 v2(1640,930) 1544,930 1501,973 1501,1440 1567,1506 1741.43,1506 1759,1488.43 1759,1449 C3.2@1758,1448 1758,1445.5 1768,1435.5 1784.07,1435.5 1785.57,1434 2057,1434 2136,1513 2136,1569 ; BOOT_ESP.2@3692.23,1360.23 3786.77,1360.23 3790,1357 ; 3790,1357 3790,1450 ; 3790,1450 C27.2@3790,1550 C28.2@3790,1627
  Bottom Layer w10: v2(1640,930) 1640,1044 1746,1150 2022,1150 2048,1124 2048,1037 2020,1009 v1(1883,1009)
  Bottom Layer w30: v1(1082,129) 2124,129 ; v2@2038.49,442.51 2038.69,442.71 2039.34,442.71 2039.58,442.48 2124,442.48 ; v2(2124,871.42) 2124,442.48 ; ILI9341.7@2208,1569 2420,1569 2508,1481 2508,1411.73 BUZZER.1@2507.27,1411 2507.27,1214.73 v2(2760,962) ; v2(2543,1769) 2543,1603.4 2543.71,1602.69 v2@2543.51,1602.49 ; ENCODER.4@2770,217 2770,132 2768,130 ; v2(3617,276) 3617,130 ; v2(3834,1443) 3834.29,1442.71 3861.29,1442.71 3881,1423 3881,330 3681,130 3617,130 ; 2124,129 2134,129 2135,130 2768,130 ; 2124,129 2124,442.48 ; 2768,130 3617,130
+5V_USB: AMS1.3 C20.1 C22.2 C25.2 C26.2 D5.2 D6.2 D9.2 D10.2 F1.1 K1.1 K2.1 K3.1 K4.1 U3.5 U4.16 U11.4 U12.4 U13.4 U14.4 | length 10592.1
  Top Layer w10: U4.16@3303.02,1616.05 3303.02,1700.02 3324,1721 3378,1721 C20.1@3379,1720 ; F1.1@3381,1969 3381,2061 3404.5,2084.5 C22.2@3457.5,2084.5 3457.5,2087 3502,2131.5 3502,2180 3515,2193 U3.5@3550,2193
  Top Layer w30: U13.4@86,764.32 84.32,766 49,766 30,785 30,1293 63.71,1326.71 120.71,1326.71 v2(121,1327) 122,1328 304.1,1328 ; D9.2@300,1088 300.55,1088.55 K3.1@300.55,1233.83 300.55,1324.45 304.1,1328 ; U12.4@448,765 447,766 410.57,766 393,783.57 393,1328 ; D6.2@660,1088 K2.1@660,1234.65 660,1327 661,1328 ; U11.4@819,762.32 817.68,761 774.57,761 757,778.57 757,1328 ; D5.2@1028,1086 K1.1@1028,1237.65 1028,1327 1027,1328 ; U14.4@1180,761.32 1179.32,762 1140.57,762 1123,779.57 1123,1328 ; D10.2@1386.74,1086 1388,1087.26 K4.1@1388,1242.65 1388,1310.43 1370.43,1328 1123,1328 ; C20.1@3379,1720 3379,1830.22 3379.78,1831 v2(3438,1831) C26.2@3516,1831 C25.2@3593,1831 3593,1869 3616,1892 3616,1927 3646,1957 3688.28,1957 AMS1.3@3689.45,1958.17 ; 3381,1831 F1.1@3381,1969 ; 304.1,1328 393,1328 ; 393,1328 661,1328 ; 661,1328 757,1328 ; 757,1328 1027,1328 ; 1027,1328 1123,1328
  Bottom Layer w30: v2(121,1327) 300,1506 2000,1506 2035,1541 2035,2264 2166,2395 3327,2395 3438,2284 v2(3438,1831)
BOOT0: BOOT_STM.1 C1.1 R1.2 U1.44 | length 1637.3
  Top Layer w10: R1.2@1513,704 1461,704 1406,649 1406,526 1441,491 1668,491 1688,511 BOOT_STM.1@1688,577 1688,638 1708,658 C1.1@1708,695 1708.64,694.36 1744.64,694.36 1759.14,679.86 v1(1759.14,471.75) ; v1(1839,672) 1839,673.31 1870.17,704.47 U1.44@2175.66,704.47
  Bottom Layer w10: v1(1759.14,471.75) 1759.14,560.65 1756,563.78 1756,649 1779,672 v1(1839,672)
DN: SW1.1 SW1.2 U3.3 | length 281.4
  Top Layer w10: SW1.1@3283,2045 SW1.2@3283,2145 3286.4,2145 3320.4,2179 3381,2179 3404.6,2155.4 U3.3@3440.59,2155.4
DP: SW1.3 SW1.4 U3.1 | length 292.9
  Top Layer w10: SW1.4@3283,2345 SW1.3@3283,2245 3283,2238 3321,2200 3380,2200 3410.4,2230.4 U3.1@3440.59,2230.4
DTR: Q2.2 R9.1 U4.13 | length 204
  Top Layer w10: Q2.2@3060.43,1490.6 3129.01,1490.6 R9.1@3130.21,1491.8 3131,1492.59 3131,1532 3153.02,1554.02 U4.13@3153.02,1616.05